# EAGLE board Hx711_schematic_V1_r0 (EAGLE 9.6.2)
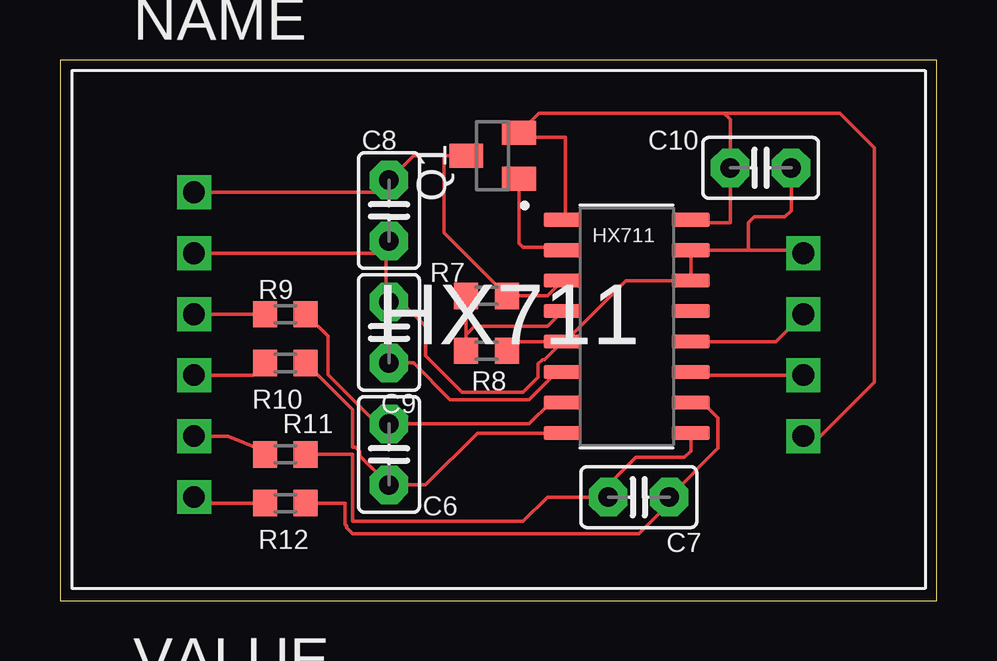
[diagram p0: board, top side]

Size 36.56 x 22.53 mm. Coordinates in mm from the lower left corner, seen from the top.
Outline: 0,0 36.56,0 36.56,22.53 0,22.53 0,0
Copper layers (1*16): Top 0.035mm / dielectric 1.5mm / Bottom 0.035mm
Design rules "default": minimum track width 6mil, minimum drill 0.35mm, track to track 6mil, track to pad 6mil, pad to pad 6mil, via to via 6mil, smd to smd 6mil, copper to edge 40mil, drill to drill 6mil, minimum pad ring 10mil, minimum via ring 8mil, stop-mask expansion 4mil, vias tented up to drill 0mil, thermal gap 10mil

## Footprints (pad centres in the part's own frame; a part is rotated, then mirrored left to right if it is on the bottom)
C2.5-2 = drill 0.813 pad 1.6 octagon: 1 -1.27,0; 2 1.27,0
SOP127P600X180-16N = smd 1.58 x 0.59: 1 -2.67,4.445; 2 -2.67,3.175; 3 -2.67,1.905; 4 -2.67,0.635; 5 -2.67,-0.635; 6 -2.67,-1.905; 7 -2.67,-3.175; 8 -2.67,-4.445; 9 2.67,-4.445; 10 2.67,-3.175; 11 2.67,-1.905; 12 2.67,-0.635; 13 2.67,0.635; 14 2.67,1.905; 15 2.67,3.175; 16 2.67,4.445
SOT23 = smd 1 x 1.4: 1 -0.95,-1.1; 2 0.95,-1.1; 3 0,1.1
R0603 = smd 1 x 1.1: 1 -0.85,0; 2 0.85,0
HX711 = drill 0.9 square: A+ 8.89,21.59; A- 8.89,24.13; B+ 8.89,16.51; B- 8.89,19.05; DT 34.29,24.13; E+ 8.89,29.21; E- 8.89,26.67; GND 34.29,26.67; SCK 34.29,21.59; VCC 34.29,19.05

## Placement (x,y rotation side)
C6  0.1uF  [C2.5-2]  13.72,6.1 270 top
C7  0.1uF  [C2.5-2]  24.13,4.32 0 top
C8  10uF  [C2.5-2]  13.72,16.26 270 top
C9  0.1uF  [C2.5-2]  13.72,11.18 90 top
C10  10uF  [C2.5-2]  29.21,18.03 180 top
HX711  HX711  [SOP127P600X180-16N]  23.62,11.43 0 top
Q1  [SOT23]  18.03,18.54 90 top
R7  20K  [R0603]  17.78,12.7 180 top
R8  8.2K  [R0603]  17.78,10.41 180 top
R9  100  [R0603]  9.4,11.94 0 top
R10  100  [R0603]  9.4,9.91 0 top
R11  100  [R0603]  9.4,6.1 0 top
R12  100  [R0603]  9.4,4.06 0 top
U$1  [HX711]  -3.3,-12.19 0 top

## Library data of the parts
C6-C10 = capacitor-wima
HX711 = HX711ss; AVAILABILITY: Not in stock; DESCRIPTION: Precision 24-bit analog-to-digital converter (ADC) designed for weigh scales and industrial control applications to interface directly with a bridge sensor.; MF: AVIA SEMICONDUCTOR; MP: HX711; PACKAGE: None; PRICE: None
Q1 = semicon-smd-ipc
R7-R12 = rcl; SPICEPREFIX: R
U$1 = HX711

## Nets
+5V: C10.2 HX711.1 HX711.16 Q1.2 U$1.VCC
A+: R10.1 U$1.A+
A-: R9.1 U$1.A-
AVDD: C8.1 HX711.3 Q1.3 R7.1 U$1.E+
B+: R12.1 U$1.B+
B-: R11.1 U$1.B-
DT: HX711.12 U$1.DT
GND: C8.2 C9.2 C10.1 HX711.5 HX711.14 HX711.15 R8.1 U$1.E- U$1.GND
N$1: HX711.2 Q1.1
N$3: HX711.4 R7.2 R8.2
N$4: C6.1 HX711.7 R9.2
N$5: C6.2 HX711.8 R10.2
N$6: C7.1 HX711.9 R11.2
N$7: C7.2 HX711.10 R12.2
N$8: C9.1 HX711.6
SCK: HX711.11 U$1.SCK

## Tracks (layer width: path | path; a pad name or v marks a point on that pad's centre or on a via)
+5V
  Top 0.152: U$1.VCC 31.7,6.86 33.95,9.11 33.95,18.88 32.51,20.32 27.69,20.32 | 27.69,20.32 19.96,20.32 Q1.2 19.32,19.3 21.08,19.3 21.08,16 HX711.1 | 27.69,20.32 27.94,20.07 C10.2 27.94,15.75 26.42,15.75 HX711.16
A+
  Top 0.152: U$1.A+ 8.04,9.4 R10.1
A-
  Top 0.152: U$1.A- R9.1
AVDD
  Top 0.152: U$1.E+ 13.72,17.02 C8.1 14.73,18.54 16,18.54 | HX711.3 20.32,12.7 R7.1 16,15.33 16,18.54 | 17.44,18.54 Q1.3 16,18.54
B+
  Top 0.152: U$1.B+ 6.1,4.32 6.35,4.06 R12.1
B-
  Top 0.152: U$1.B- 7.01,6.86 8.34,6.31 R11.1
DT
  Top 0.152: 30.35,11.3 U$1.DT 29.84,10.8 HX711.12
GND
  Top 0.152: 26.16,13.33 HX711.14 | U$1.E- 13.21,14.48 13.59,14.86 | 13.59,14.86 C8.2 | R8.1 19.01,10.8 HX711.5 | 13.59,14.86 13.59,12.57 C9.2 14.22,12.45 15.24,11.43 15.24,10.21 16.76,8.69 19.3,8.69 19.93,9.32 19.93,9.87 20.11,10.05 20.21,10.05 HX711.5 | HX711.5 21.05,10.8 23.59,13.33 HX711.14 | HX711.14 HX711.15 28.7,14.61 | 30.35,14.61 30.48,14.48 U$1.GND 30.86,14.61 28.7,14.61 | 28.7,14.61 28.7,15.75 28.96,16 30.23,16 30.48,16.26 C10.1
N$1
  Top 0.152: HX711.2 20.83,14.73 19.3,14.73 19.13,14.9 Q1.1
N$3
  Top 0.152: HX711.4 20.32,11.43 17.27,11.43 16.93,11.09 | 16.93,11.09 R8.2 | R7.2 16.93,11.09
N$4
  Top 0.152: R9.2 11.18,11.01 11.18,9.41 13.22,7.37 C6.1 19.56,7.37 20.45,8.25 HX711.7
N$5
  Top 0.152: HX711.8 20.83,6.98 20.19,6.98 17.4,6.98 15.24,4.83 C6.2 12.5,6.05 12.5,6.22 12.32,6.4 12.19,6.4 12.19,7.96 R10.2
N$6
  Top 0.152: R11.2 12.19,6.1 12.19,3.3 19.3,3.3 20.32,4.32 C7.1 22.86,4.83 24,5.97 26.03,5.97 26.29,6.23 HX711.9
N$7
  Top 0.152: R12.2 11.89,4.06 11.89,3.18 11.94,3.12 11.94,3.05 12.19,2.79 24.13,2.79 25.4,4.06 C7.2 27.43,6.35 27.43,7.62 26.8,8.25 HX711.10
N$8
  Top 0.152: C9.1 14.73,9.91 16.26,8.38 19.55,8.38 20.7,9.52 HX711.6
SCK
  Top 0.152: U$1.SCK 26.42,9.4 HX711.11